# EAGLE board GW-RFM-V40-Mini009 (EAGLE 7.6.0)

Size 72 x 21 mm. Coordinates in mm from the lower left corner, seen from the top.
Outline: 0,1.5 0,19.5 arc90 1.5,21 70.5,21 arc90 72,19.5 72,1.5 arc90 70.5,0 1.5,0 arc90 0,1.5
Copper layers (1*16): Top 0.035mm / dielectric 1.5mm / Bottom 0.035mm
Design rules "default": minimum track width 6mil, minimum drill 0.35mm, track to track 6mil, track to pad 6mil, pad to pad 6mil, via to via 6mil, smd to smd 6mil, copper to edge 40mil, drill to drill 6mil, minimum pad ring 10mil, minimum via ring 8mil, stop-mask expansion 4mil, vias tented up to drill 0mil, thermal gap 10mil
Net classes: 0 default: width 0.254 mm; 1 Power: width 0.406 mm
Holes 2.2 mm at 2,18

## Footprints (pad centres in the part's own frame; a part is rotated, then mirrored left to right if it is on the bottom)
1X01 = drill 1.016 octagon: 1 0,0
ARDUINO_NANO = drill 0.8 square: 1 -20.32,-7.62 | drill 0.8: 2 -17.78,-7.62; 3 -15.24,-7.62; 4 -12.7,-7.62; 5 -10.16,-7.62; 6 -7.62,-7.62; 7 -5.08,-7.62; 8 -2.54,-7.62; 9 0,-7.62; 10 2.54,-7.62; 11 5.08,-7.62; 12 7.62,-7.62; 13 10.16,-7.62; 14 12.7,-7.62; 15 15.24,-7.62; 16 15.24,7.62; 17 12.7,7.62; 18 10.16,7.62; 19 7.62,7.62; 20 5.08,7.62; 21 2.54,7.62; 22 0,7.62; 23 -2.54,7.62; 24 -5.08,7.62; 25 -7.62,7.62; 26 -10.16,7.62; 27 -12.7,7.62; 28 -15.24,7.62; 29 -17.78,7.62; 30 -20.32,7.62
C1210 = smd 1.6 x 2.7: 1 -1.4,0; 2 1.4,0
C1206 = smd 1.6 x 1.8: 1 -1.4,0; 2 1.4,0
SOT23 = smd 1.016 x 1.143: 1 -0.889,-1.016; 2 0.889,-1.016; 3 0,1.016
SOT223 = smd 1.219 x 2.235: 1 -2.311,-3.099; 2 0,-3.099; 3 2.311,-3.099 | smd 3.6 x 2.2: TAB 0,3.099
1X04-S = drill 1.016 square: 1 -3.81,0 | drill 1.016 octagon: 2 -1.27,0; 3 1.27,0; 4 3.81,0
M0805 = smd 1.3 x 1.6: 1 -0.95,0; 2 0.95,0
RFM = smd 2.184 x 1.067: ANT 19.651,2.889; DIO0 0,13.27; DIO1 0,11.143; DIO2 0,9.047; DIO3 0,6.889; DIO4 0,4.889; DIO5 0,2.889; GNDA 19.651,4.889; GNDB 19.651,1.048; MISO 19.651,9.047; MOSI 19.651,11.047; NC 19.651,15.334; NSS 19.651,13.206; RESET 0,15.27; SCK 19.651,7.048; VCC 0,1.048
RFM69HCW-XXXS2 = smd 3 x 1.2: 3.3V 7.5,1; ANT 7.5,-7; DIO0 7.5,3; DIO1 7.5,5; DIO2 7.5,7; GND_1 7.5,-5; GND_2 -7.5,-7; GND_3 -7.5,7; MISO -7.5,5; MOSI -7.5,3; NSS -7.5,-1; RESET -7.5,-3; SCK -7.5,1
SMA_EDGELAUNCH = smd 4.064 x 1.524: GND@1 2.032,-2.54; GND@2 2.032,2.54 | smd 4.064 x 1.524 bottom: GND@3 2.032,2.54; GND@4 2.032,-2.54 | smd 4.064 x 1.27: P 2.032,0

## Placement (x,y rotation side)
ANT1  [1X01]  2.54,5.62 0 top
ARDUINO_NANO  [ARDUINO_NANO]  48.99,10.7 180 top
C1  10uF  [C1210]  38.5,8 270 top
C6  0.1uF  [C1206]  55,8 270 bottom
IC1  ATSHA204A  [SOT23]  27.79,2.64 270 top
IC6  LM1117MPX-ADJ  [SOT223]  64,9 90 bottom
JP17  [1X04-S]  70,10.5 270 top
R1  4K7  [M0805]  49,8 270 bottom
R3  4K7  [M0805]  46,13 90 bottom
R4  10k  [M0805]  52,8 270 bottom
R5  4K7  [M0805]  55,13 270 bottom
R7  10K  [M0805]  46,8 90 bottom
R8  10K  [M0805]  49,13 270 bottom
R11  10K  [M0805]  52,13 270 bottom
RFM69W  RFM69HW  [RFM]  30.21,1.81 0 bottom
U1  RFM69HCW  [RFM69HCW-XXXS2]  13.97,11.97 0 bottom
X2  [SMA_EDGELAUNCH]  0,5.62 180 bottom

## Library data of the parts
ANT1 = pinhead
ARDUINO_NANO = ArduinoNanoV30
C1 C6 R1 R3-R5 R7 R8 R11 = rcl
IC1 = Sensor
IC6 = lm1117
JP17 = pinhead-2
RFM69W = hoperf
U1 = doug
X2 = adafruit

## Nets
3V3: ARDUINO_NANO.2 C1.1 IC1.2 IC6.2 IC6.TAB JP17.1 RFM69W.VCC U1.3.3V
A0: ARDUINO_NANO.4
A1: ARDUINO_NANO.5
A2: ARDUINO_NANO.6
A3: ARDUINO_NANO.7
A4: ARDUINO_NANO.8 JP17.4
A5: ARDUINO_NANO.9 JP17.3
A6: ARDUINO_NANO.10
A7: ARDUINO_NANO.11
ANT: ANT1.1 RFM69W.ANT U1.ANT X2.P
CSN: R1.1 R4.1 R7.2 RFM69W.NSS U1.NSS
D3: ARDUINO_NANO.21
D4: ARDUINO_NANO.22
D5: ARDUINO_NANO.23
D6: ARDUINO_NANO.24
D7/ATSHA: ARDUINO_NANO.25 IC1.1
D8: ARDUINO_NANO.26
D9: ARDUINO_NANO.27
GND [Power]: ARDUINO_NANO.14 ARDUINO_NANO.19 C1.2 C6.2 IC1.3 IC6.1 JP17.2 R7.1 R8.1 R11.1 RFM69W.GNDA RFM69W.GNDB U1.GND_1 U1.GND_2 U1.GND_3 X2.GND@1 X2.GND@2 X2.GND@3 X2.GND@4
IRQ: ARDUINO_NANO.20 RFM69W.DIO0 U1.DIO0
MISO: ARDUINO_NANO.30 RFM69W.MISO U1.MISO
MOSI: R3.1 R8.2 RFM69W.MOSI U1.MOSI
N$5: ARDUINO_NANO.1 R5.1
N$8: ARDUINO_NANO.28 R1.2
N$9: ARDUINO_NANO.29 R3.2
N$12: U1.DIO2
N$13: U1.RESET
N$15: U1.DIO1
N$16: ARDUINO_NANO.3
N$22: ARDUINO_NANO.18
RESET: ARDUINO_NANO.13
RW: ARDUINO_NANO.15
RX: ARDUINO_NANO.17
SCK: R5.2 R11.2 RFM69W.SCK U1.SCK
TX: ARDUINO_NANO.16
VCC [Power]: ARDUINO_NANO.12 C6.1 IC6.3 R4.2

## Tracks (layer width: path | path; a pad name or v marks a point on that pad's centre or on a via)
3V3  (7 unrouted)
A4  (1 unrouted)
A5  (1 unrouted)
ANT  (3 unrouted)
CSN  (4 unrouted)
D7/ATSHA  (1 unrouted)
GND  (18 unrouted)
IRQ  (2 unrouted)
MISO  (2 unrouted)
MOSI  (3 unrouted)
N$5  (1 unrouted)
N$8  (1 unrouted)
N$9  (1 unrouted)
SCK  (3 unrouted)
VCC  (3 unrouted)